# Altium PCB PCB1.PcbDoc (part 2 of 2)
Units mil, origin at the board's own origin, x right, y up, seen from the top; angles counter-clockwise.
Board outline 2600 x 2600 mil, 4 copper layers (Top Layer, Layer 1, Layer 2, Bottom Layer), stack 68.756 mil thick; 75 components, 74 nets, 370 pads, 169 vias.
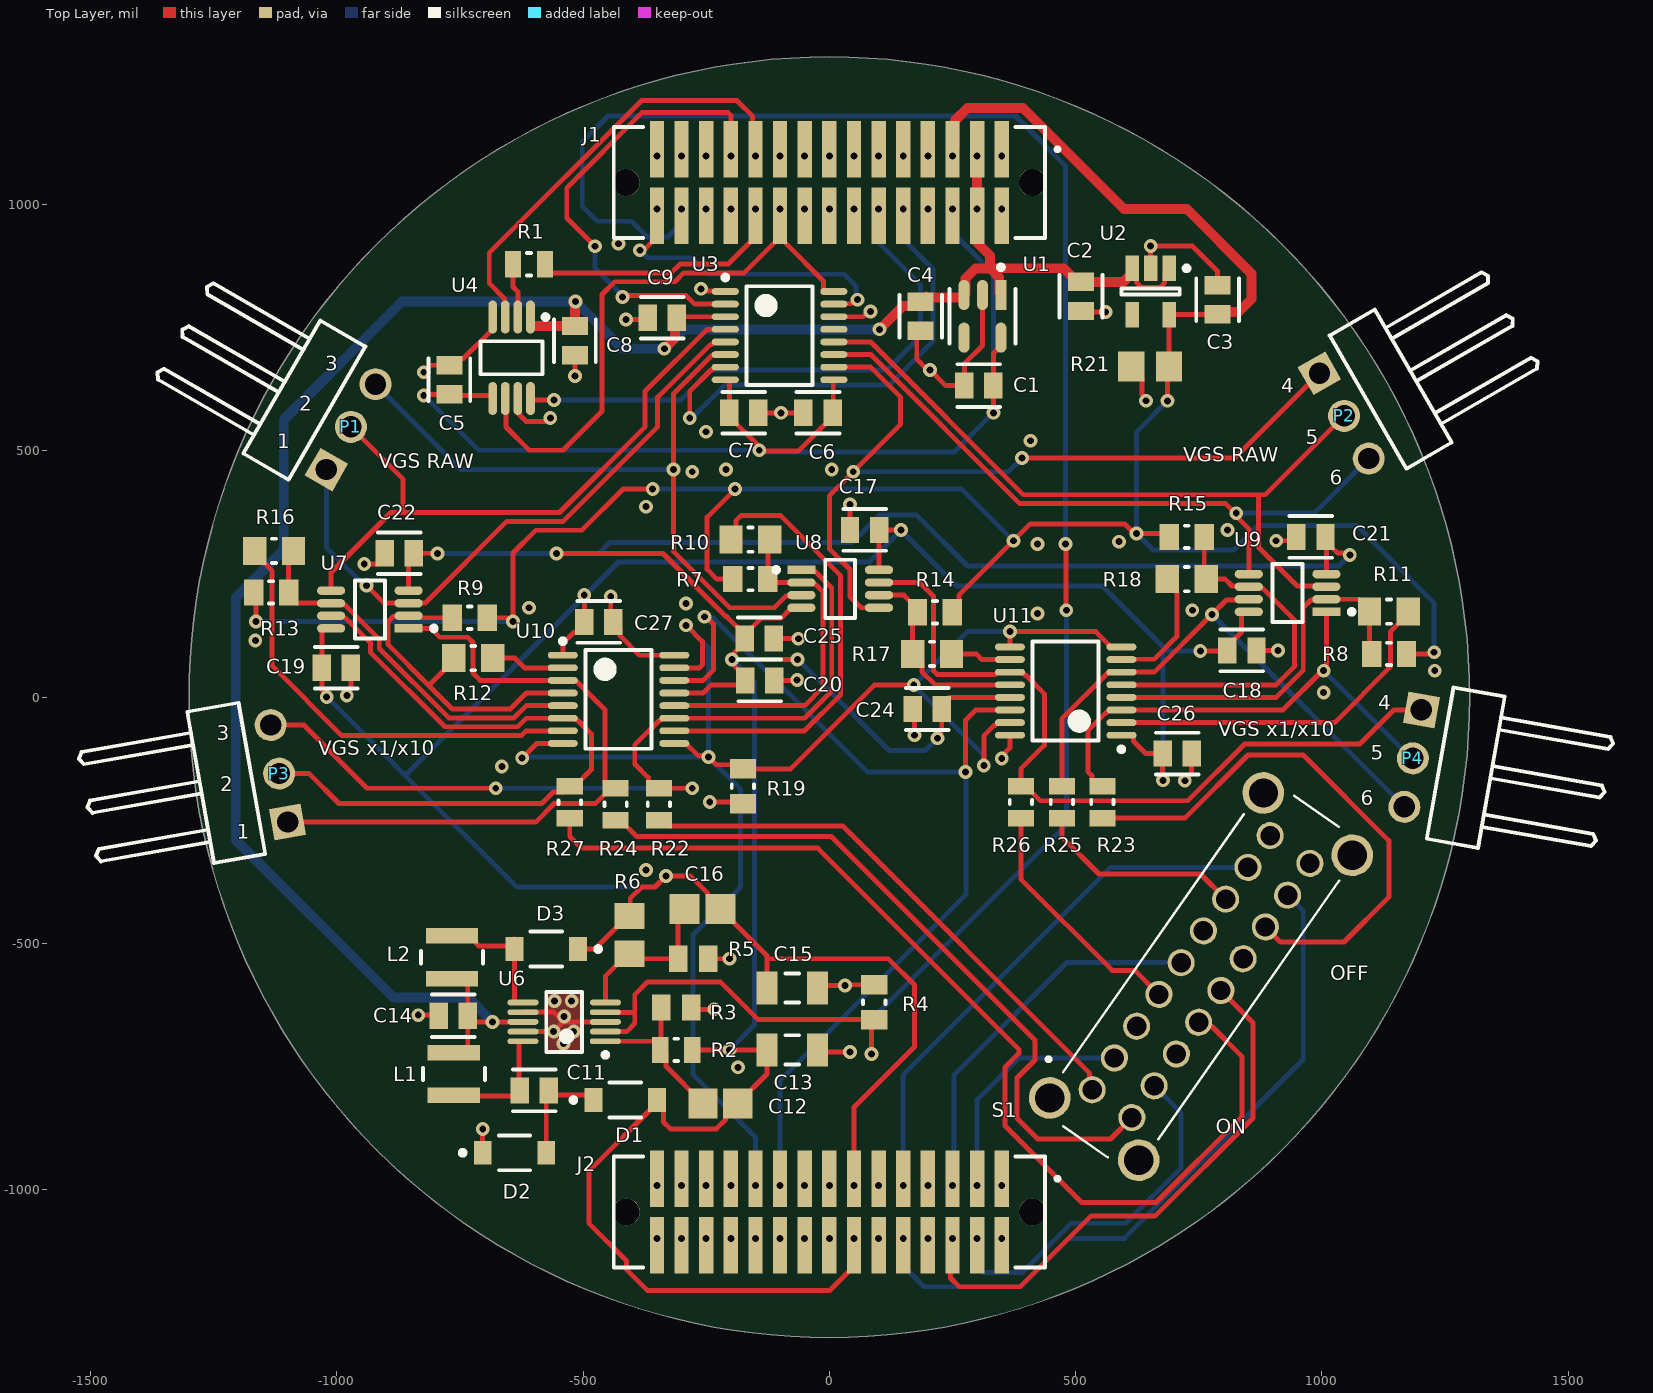
[diagram p0: Top Layer view]

## Polygon pours and split planes (outlines as drawn) (continued)
GND on Layer 1 (split plane): 265 vertices, not listed, extent -1279.99,-1279.99 1279.99,1279.99

## Silkscreen, mask and mechanical layers (free items; w line width, h text height)
Top Overlay:
  text "3" at -1023.32,662.59 h30
  text "4" at 917.73,617.77 h30
  text "2" at -1075.92,581.97 h30
  text "5" at 967,514 h30
  text "1" at -1120.38,505.38 h30
  text "VGS RAW" at 718.47,477.71 h30
  text "VGS RAW" at -914.27,464.64 h30
  text "6" at 1016.17,431 h30
  text "4" at 1114.87,-25.93 h30
  text "VGS x1/x10" at 789.58,-79.06 h30
  text "3" at -1243.47,-86.94 h30
  text "VGS x1/x10" at -1037.7,-118.24 h30
  text "5" at 1099.06,-127.29 h30
  text "2" at -1236.75,-190.64 h30
  text "6" at 1078.49,-219.74 h30
  text "1" at -1203.06,-287.11 h30
  text "OFF" at 1017.48,-574.38 h30
  text "ON" at 784.06,-886.09 h30
Bottom Overlay:
  text "Breathalyzer- Amplifier" at 509.08,44.08 h60
  text "Neel Mondal         Palacios Group, MIT   April 2023" at 509.08,-218.13 h40
Board:
  circle w5: c0,0 r1300